# EAGLE board speed (EAGLE 8.2.2)
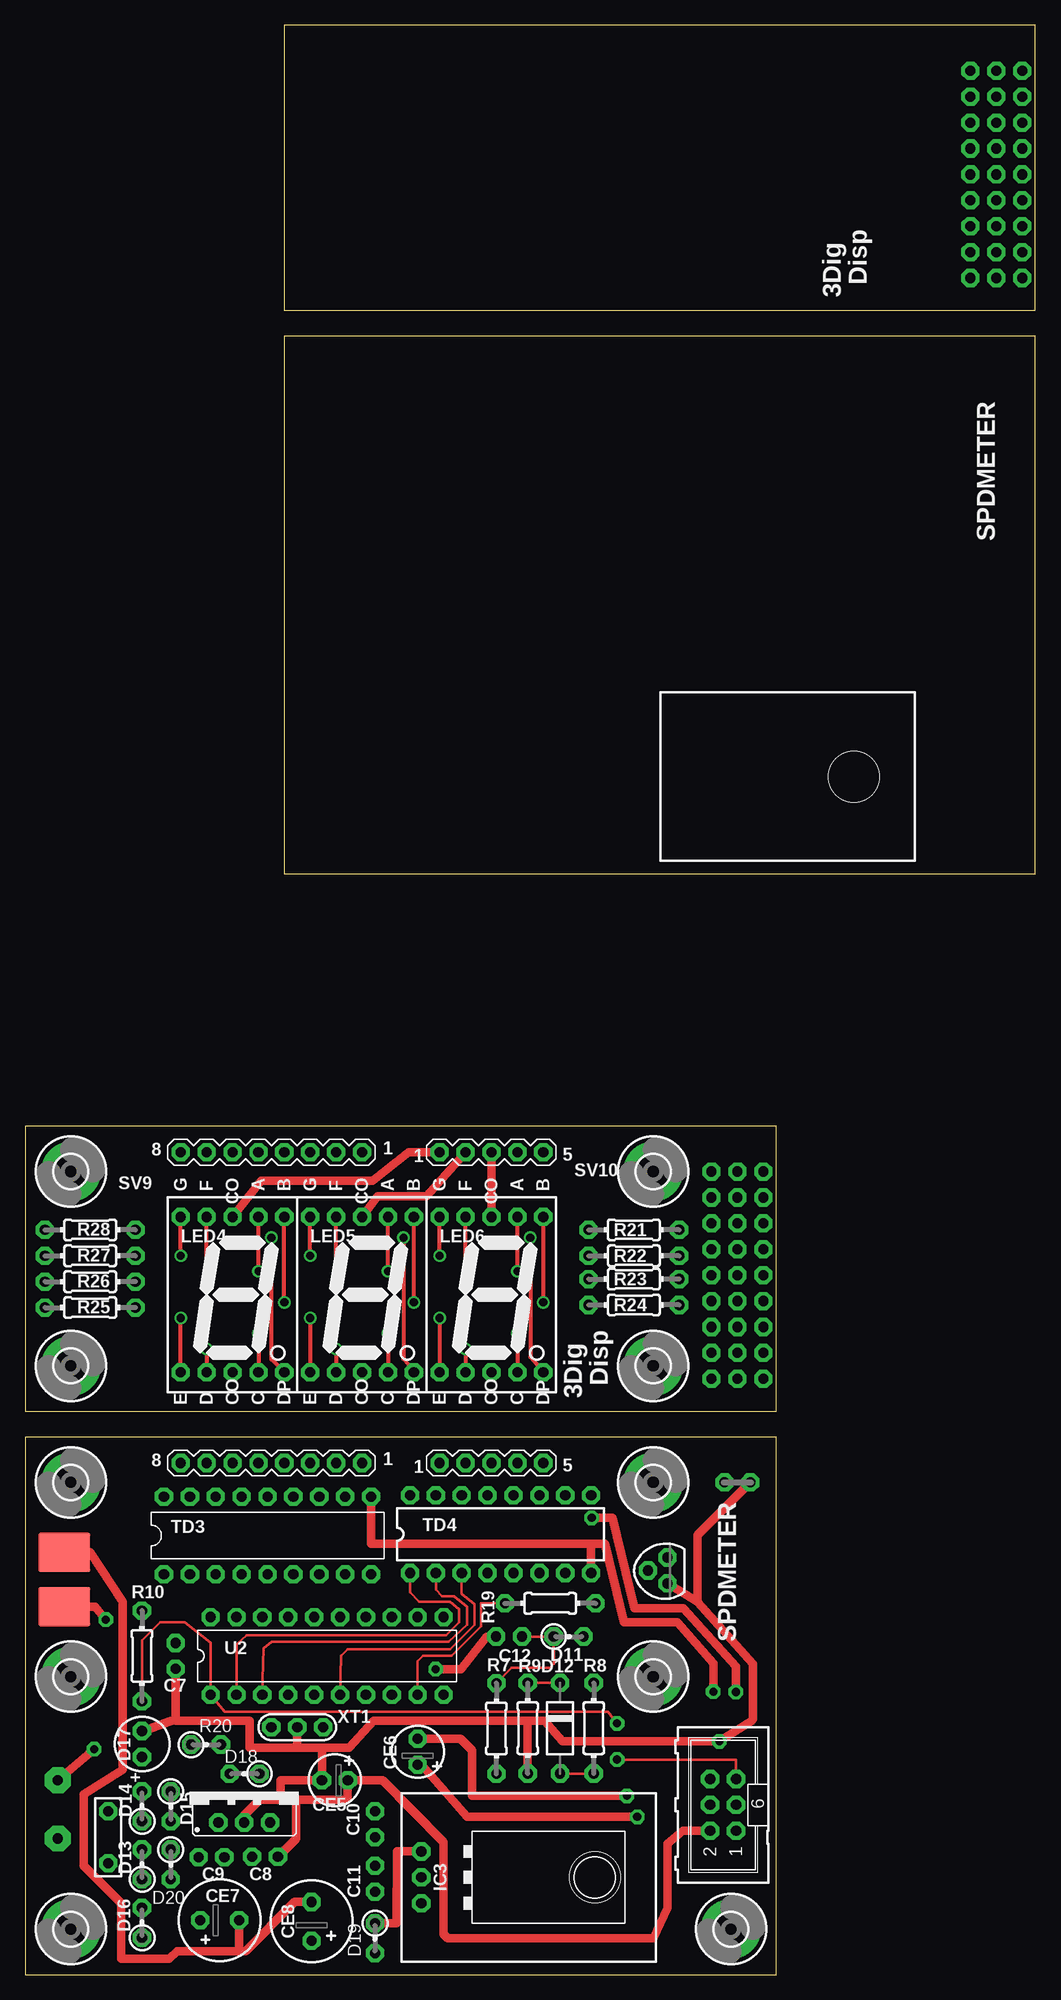
[diagram p0: board, top side]
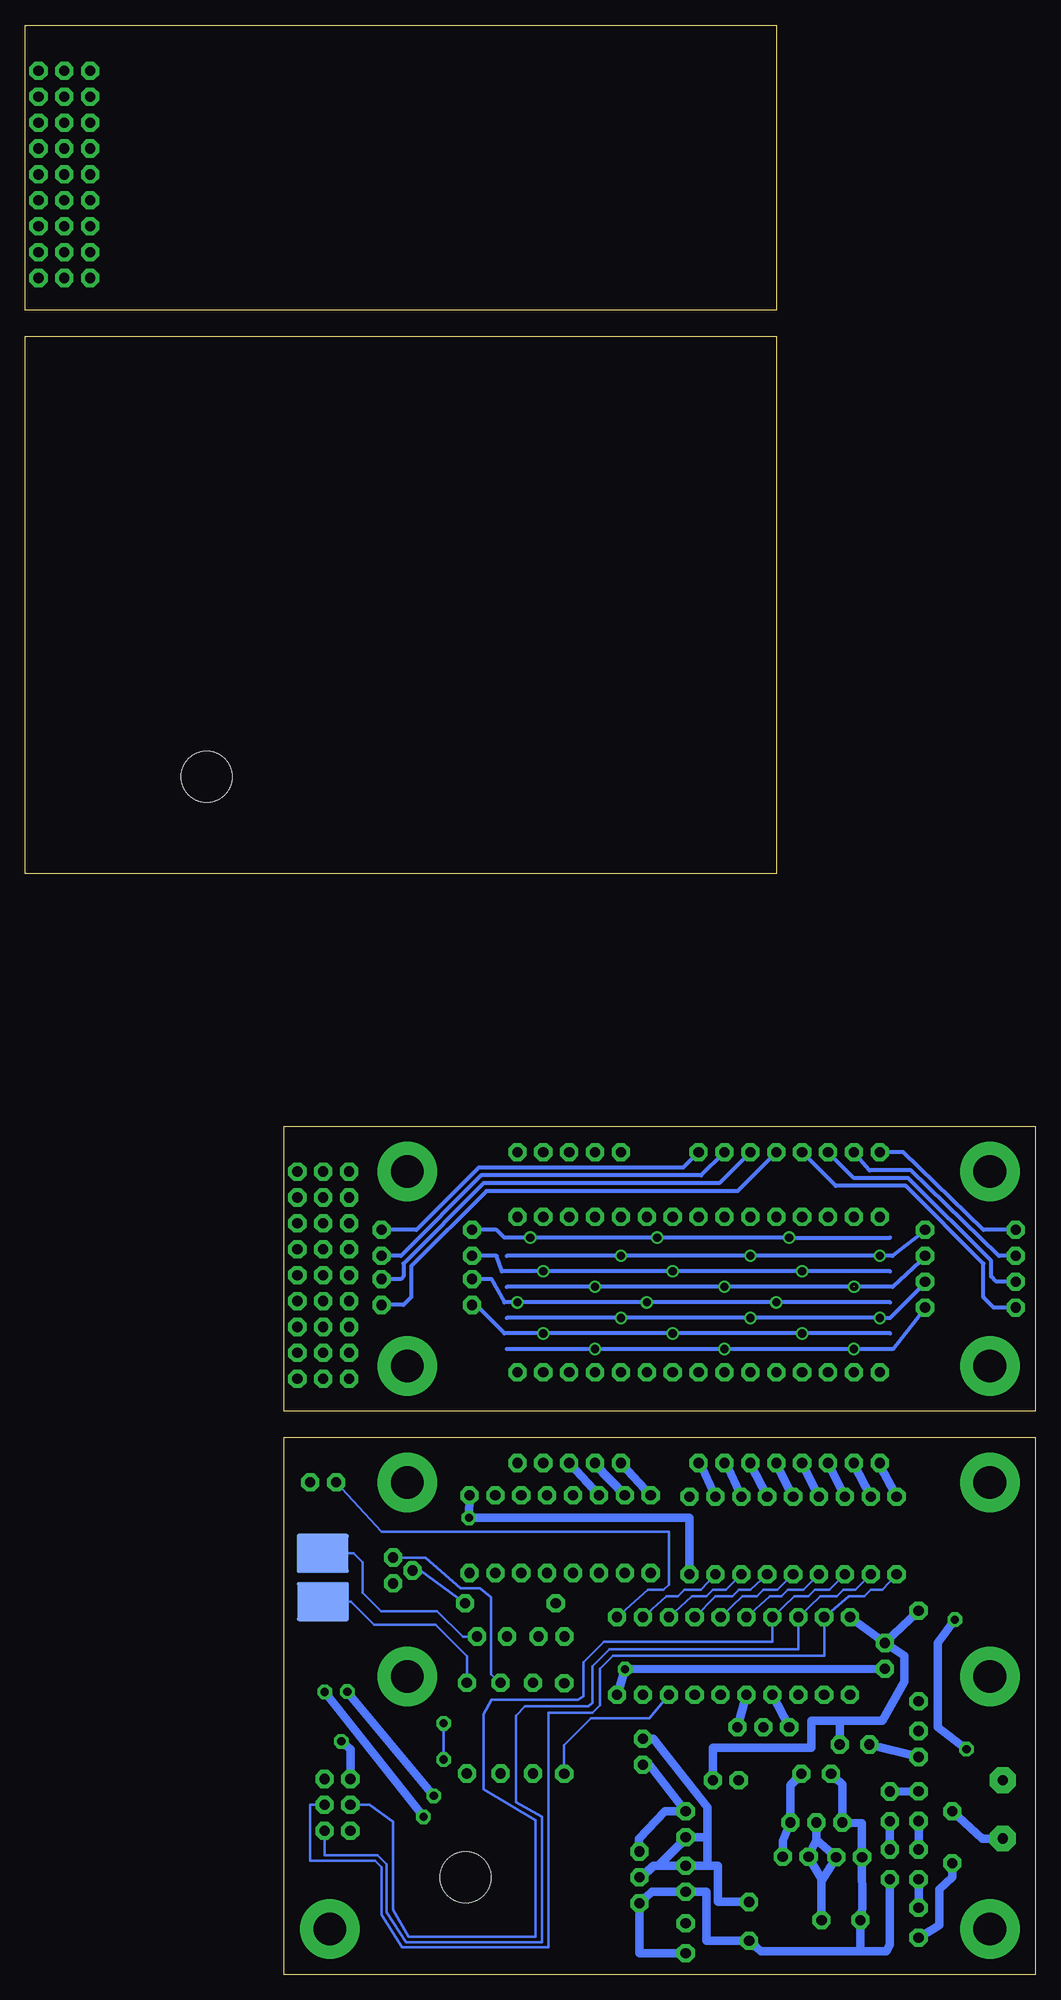
[diagram p1: board, bottom side, seen from below]

Size 99.06 x 191.13 mm. Coordinates in mm from the lower left corner, seen from the top.
Outline: 25.4,107.95 99.06,107.95 99.06,160.66 25.4,160.66 25.4,107.95
Outline: 25.4,163.19 99.06,163.19 99.06,191.13 25.4,191.13 25.4,163.19
Outline: 0,0 73.66,0 73.66,52.71 0,52.71 0,0
Outline: 0,55.25 73.66,55.25 73.66,83.19 0,83.19 0,55.25
Copper layers (1*16): Top 0.0356mm / dielectric 1.5011mm / Bottom 0.0356mm
Design rules "SilverCircuits": minimum track width 10mil, minimum drill 24mil, track to track 8mil, track to pad 8mil, pad to pad 8mil, via to via 8mil, smd to smd 8mil, copper to edge 40mil, drill to drill 8mil, minimum pad ring 10mil, minimum via ring 8mil, stop-mask expansion 4mil, vias tented up to drill 0mil, thermal gap 10mil
Net classes: 0 default: width 0.254 mm; 1 SUPLLY: width 0.813 mm

## Footprints (pad centres in the part's own frame; a part is rotated, then mirrored left to right if it is on the bottom)
C-2,5 = drill 1 pad 1.778 octagon: 1 -1.27,0; 2 1.27,0
ELC-2,5 = drill 1 pad 1.778 octagon: MAINAS 2.54,0; PLUS 0,0
ELC-5 = drill 1 pad 1.778 octagon: MAINAS 3.175,0; PLUS -0.635,0
0204V = drill 1 pad 1.778 octagon: 1 -1.46,0; 2 1.46,0
DIP-2-10 = drill 1 pad 1.778 octagon: A 4.445,0; C -4.445,0
LED5MM = drill 1 pad 1.778 octagon: A -1.27,0; K 1.27,0
3,2-PAD = drill 3.2 pad 5.842: B3,2 0,0
78XXL = drill 1 pad 1.778 octagon: GND 0,-6.3; IN -2.54,-6.3; OUT 2.54,-6.3
78XXS = drill 1 pad 1.778 octagon: GND 0,-3; IN -2.54,-3; OUT 2.54,-3
JUMP2 = drill 1 pad 1.778 octagon: 1 -1.27,0; 2 1.27,0
7SEG-0.56 = drill 1 pad 1.778 octagon: A 2.54,7.62; B 5.08,7.62; C 2.54,-7.62; COM 0,7.62; COM1 0,-7.62; D -2.54,-7.62; DP 5.08,-7.62; E -5.08,-7.62; F -2.54,7.62; G -5.08,7.62
0204/5 = drill 1 pad 1.778 octagon: 1 -2.54,0; 2 2.54,0
CFPAD = smd 5.08 x 3.81: CPAD 0,0
CPPAD = drill 1 pad 2.54 octagon: CPPAD 0,0
0204/7 = drill 1 pad 1.778 octagon: 1 -4.445,0; 2 4.445,0
MA08-1 = drill 1 pad 1.778 octagon: 1 -8.89,0; 2 -6.35,0; 3 -3.81,0; 4 -1.27,0; 5 1.27,0; 6 3.81,0; 7 6.35,0; 8 8.89,0
MA05-1 = drill 1 pad 1.778 octagon: 1 -5.08,0; 2 -2.54,0; 3 0,0; 4 2.54,0; 5 5.08,0
ML6 = drill 1 pad 1.778 octagon: 1 -2.54,-1.27; 2 -2.54,1.27; 3 0,-1.27; 4 0,1.27; 5 2.54,-1.27; 6 2.54,1.27
TO92 = drill 1 pad 1.778 octagon: 1 1.27,0; 2 0,1.905; 3 -1.27,0
DIP-18 = drill 1 pad 1.778 octagon: 1 -10.16,-3.81; 2 -7.62,-3.81; 3 -5.08,-3.81; 4 -2.54,-3.81; 5 0,-3.81; 6 2.54,-3.81; 7 5.08,-3.81; 8 7.62,-3.81; 9 10.16,-3.81; 10 10.16,3.81; 11 7.62,3.81; 12 5.08,3.81; 13 2.54,3.81; 14 0,3.81; 15 -2.54,3.81; 16 -5.08,3.81; 17 -7.62,3.81; 18 -10.16,3.81
DIP-16 = drill 1 pad 1.778 octagon: 1 -8.89,-3.81; 2 -6.35,-3.81; 3 -3.81,-3.81; 4 -1.27,-3.81; 5 1.27,-3.81; 6 3.81,-3.81; 7 6.35,-3.81; 8 8.89,-3.81; 9 8.89,3.81; 10 6.35,3.81; 11 3.81,3.81; 12 1.27,3.81; 13 -1.27,3.81; 14 -3.81,3.81; 15 -6.35,3.81; 16 -8.89,3.81
DIP-20 = drill 1 pad 1.778 octagon: 1 -11.43,-3.81; 2 -8.89,-3.81; 3 -6.35,-3.81; 4 -3.81,-3.81; 5 -1.27,-3.81; 6 1.27,-3.81; 7 3.81,-3.81; 8 6.35,-3.81; 9 8.89,-3.81; 10 11.43,-3.81; 11 11.43,3.81; 12 8.89,3.81; 13 6.35,3.81; 14 3.81,3.81; 15 1.27,3.81; 16 -1.27,3.81; 17 -3.81,3.81; 18 -6.35,3.81; 19 -8.89,3.81; 20 -11.43,3.81
TO-220HEATSINKN = hole 5: 0,0
CELALOCK = drill 1 pad 1.778 octagon: GND 0,0; X1 -2.54,0; X2 2.54,0

## Placement (x,y rotation side)
C7  0.1  [C-2,5]  14.73,31.24 90 top
C8  0.1  [C-2,5]  23.49,11.56 0 top
C9  0.1  [C-2,5]  18.25,11.51 180 top
C10  0.1  [C-2,5]  34.29,14.73 90 top
C11  0.1  [C-2,5]  34.29,9.4 270 top
C12  1000p  [C-2,5]  47.45,33.15 0 top
CE5  100  [ELC-2,5]  31.62,19.05 180 top
CE6  100  [ELC-2,5]  38.48,20.57 90 top
CE7  220  [ELC-5]  17.78,5.33 0 top
CE8  220  [ELC-5]  28.07,3.94 90 top
D11  SHOT  [0204V]  53.29,33.15 0 top
D12  [DIP-2-10]  52.45,24.16 270 top
D13  [0204V]  11.43,10.8 90 top
D14  [0204V]  11.43,16.51 90 top
D15  [0204V]  14.25,16.48 270 top
D16  [0204V]  11.43,5.08 90 top
D17  LED  [LED5MM]  11.43,22.61 90 top
D18  [0204V]  21.48,19.67 180 top
D19  [0204V]  34.29,3.56 270 top
D20  [0204V]  14.25,10.8 270 top
H7  MOUNT-PAD-ROUND3.2  [3,2-PAD]  4.45,4.45 0 top
H8  MOUNT-PAD-ROUND3.2  [3,2-PAD]  69.22,4.45 0 top
H9  MOUNT-PAD-ROUND3.2  [3,2-PAD]  61.59,48.26 0 top
H10  MOUNT-PAD-ROUND3.2  [3,2-PAD]  4.45,48.26 0 top
H15  MOUNT-PAD-ROUND3.2  [3,2-PAD]  4.45,29.21 0 top
H16  MOUNT-PAD-ROUND3.2  [3,2-PAD]  61.59,29.21 0 top
H17  MOUNT-PAD-ROUND3.2  [3,2-PAD]  4.45,78.74 0 top
H18  MOUNT-PAD-ROUND3.2  [3,2-PAD]  4.45,59.69 0 top
H19  MOUNT-PAD-ROUND3.2  [3,2-PAD]  61.59,59.69 0 top
H20  MOUNT-PAD-ROUND3.2  [3,2-PAD]  61.59,78.74 0 top
IC3  8V  [78XXL]  45.14,9.53 270 top
IC4  5V  [78XXS]  21.46,17.91 0 top
J2  HUD  [JUMP2]  69.85,48.26 0 top
LED4  C-551X  [7SEG-0.56]  20.32,66.68 0 top
LED5  C-551X  [7SEG-0.56]  33.02,66.68 0 top
LED6  C-551X  [7SEG-0.56]  45.72,66.68 0 top
P2  PL  [0204/5]  8.13,13.46 270 top
PD3  12V  [CFPAD]  3.81,36.07 0 top
PD4  GND  [CFPAD]  3.81,41.4 0 top
PD9  SPD  [CFPAD]  69.9,41.3 0 bottom
PD10  ILM  [CFPAD]  69.88,36.58 0 bottom
PD11  PSW1  [CPPAD]  3.17,19.05 0 top
PD12  PSW2  [CPPAD]  3.17,13.34 0 top
R7  100  [0204/7]  46.2,24.13 270 top
R8  100k  [0204/7]  55.75,24.16 270 top
R9  100k  [0204/7]  49.28,24.16 90 top
R10  10k  [0204/7]  11.43,31.24 90 top
R19  100  [0204/7]  51.49,36.4 180 top
R20  300  [0204V]  17.71,22.55 0 top
R21  [0204/7]  59.69,73.03 180 top
R22  [0204/7]  59.69,70.48 180 top
R23  [0204/7]  59.69,68.2 180 top
R24  [0204/7]  59.69,65.66 180 top
R25  [0204/7]  6.35,65.41 0 top
R26  [0204/7]  6.35,67.94 0 top
R27  [0204/7]  6.35,70.48 0 top
R28  [0204/7]  6.35,73.03 0 top
SV6  SEG  [MA08-1]  24.13,50.17 180 top
SV7  CONT  [MA05-1]  45.72,50.17 0 top
SV8  ISP  [ML6]  68.45,16.64 90 top
SV9  SEG  [MA08-1]  24.13,80.65 180 top
SV10  CONT  [MA05-1]  45.72,80.65 0 top
T2  2SC1815  [TO92]  62.99,39.62 90 top
TD3  TD62783  [DIP-18]  23.75,43.05 0 top
TD4  TD62003  [DIP-16]  46.61,43.18 0 top
U2  ATTINY2313  [DIP-20]  29.59,31.24 0 top
U$1  [TO-220HEATSINKN]  81.28,117.48 180 top
U$2  [TO-220HEATSINKN]  55.88,9.53 180 top
XT1  10M  [CELALOCK]  26.67,24.26 0 top

## Library data of the parts
C7-C12 CE5-CE8 D11-D20 H7-H10 H15-H20 IC3 IC4 J2 LED4-LED6 P2 PD3 PD4 PD9-PD12 R7-R10 R19-R28 SV6-SV10 T2 TD3 TD4 U2 U$1 U$2 XT1 = myparts01

## Nets
+5V/1 [SUPLLY]: C7.2 C8.2 CE5.PLUS D18.1 IC4.OUT R10.2 R20.2 SV8.2 U2.20
+9V [SUPLLY]: C10.2 CE6.PLUS D19.1 IC3.IN TD3.9 TD4.9
B0: LED4.DP LED5.DP LED6.DP R21.2
B1: LED4.A LED5.A LED6.A R22.2
B2: LED4.B LED5.B LED6.B R23.2
B3: LED4.C LED5.C LED6.C R24.2
B4: LED4.D LED5.D LED6.D R25.2
B5: LED4.E LED5.E LED6.E R26.2
B6: LED4.F LED5.F LED6.F R27.2
B7: LED4.G LED5.G LED6.G R28.2
C0 [SUPLLY]: LED4.COM SV10.1
C1 [SUPLLY]: LED5.COM SV10.2
C2 [SUPLLY]: LED6.COM SV10.3
D0: R21.1 SV9.1
D1: R22.1 SV9.2
D2: R23.1 SV9.3
D3: R24.1 SV9.4
D4: R25.1 SV9.5
D5: R26.1 SV9.6
D6: R27.1 SV9.7
D7: R28.1 SV9.8
N$38: R10.1 SV8.5 U2.1
N$45: SV8.3 TD3.1 U2.19
N$46: SV8.1 TD3.2 U2.18
N$47: SV8.4 TD3.3 U2.17
N$48: TD3.4 U2.16
N$49: TD3.5 U2.15
N$50: TD3.6 U2.14
N$51: TD3.7 U2.13
N$52: R7.2 U2.8
N$80: J2.1 U2.11
N$81: C12.2 D11.1 R7.1
N$82: D11.2 PD9.CPAD
N$83: D12.A R8.2
N$84: PD10.CPAD R8.1
N$85: U2.5 XT1.X2
N$86: U2.4 XT1.X1
N$87: R19.2 U2.9
N$88: TD3.8 U2.12
N$89: TD4.1 U2.2
N$90: TD4.2 U2.3
N$91: TD4.3 U2.6
N$92: SV7.1 TD4.16
N$93: SV7.2 TD4.15
N$94: SV7.3 TD4.14
N$95 [SUPLLY]: C9.2 C11.2 CE7.PLUS CE8.PLUS D18.2 D19.2 D20.2 IC3.OUT IC4.IN
N$96: D12.C R9.2 T2.1
N$97 [SUPLLY]: P2.1 PD12.CPPAD
N$98 [SUPLLY]: PD3.CPAD PD11.CPPAD
N$99: SV6.1 TD3.11
N$100: SV6.2 TD3.12
N$101: SV6.3 TD3.13
N$102: SV6.4 TD3.14
N$103: SV6.5 TD3.15
N$104: SV6.6 TD3.16
N$105: SV6.7 TD3.17
N$106: SV6.8 TD3.18
N$107 [SUPLLY]: D16.1 P2.2
N$108 [SUPLLY]: D13.1 D16.2
N$109 [SUPLLY]: D13.2 D14.1
N$110 [SUPLLY]: D14.2 D15.1
N$111: R19.1 T2.2
N$112: D17.A R20.1
N$113 [SUPLLY]: D15.2 D20.1
PE [SUPLLY]: C7.1 C8.1 C9.1 C10.1 C11.1 C12.1 CE5.MAINAS CE6.MAINAS CE7.MAINAS CE8.MAINAS D17.K IC3.GND IC4.GND J2.2 PD4.CPAD R9.1 SV8.6 T2.3 TD3.10 TD4.8 U2.10 XT1.GND

## Tracks (layer width: path | path; a pad name or v marks a point on that pad's centre or on a via)
+5V/1  (1 unrouted)
  Top 0.813: SV8.2 64.52,14.1 62.99,12.83 62.99,6.5 61.59,3.56 41.4,3.56 41.02,3.94 41.02,12.95 35.05,19.05 CE5.PLUS 31.62,17.14 26.54,17.14 26.54,13.34 C8.2
  Bottom 0.813: C7.2 U2.20 | C7.2 12.83,31.24 12.83,28.7 14.99,24.89 19.18,24.89 | 19.18,24.89 21.97,24.89 21.97,22.23 31.62,22.23 CE5.PLUS | C7.2 R10.2 | C8.2 24.76,13.13 IC4.OUT 24,18.55 D18.1 | 19.18,24.89 R20.2
+9V  (via drill 0.8 pad 1.42)
  Top 0.813: CE6.PLUS 38.86,20.57 43.31,15.47 v60.02,15.47 | v69.7,27.71 69.7,30.23 64.54,35.92 59.77,35.92 57.58,44.78 v55.55,44.78 | D19.1 36.42,5.02 36.45,12.06 IC3.IN
  Bottom 0.813: IC3.IN 38.86,13.34 36.32,16 C10.2 | C10.2 34.04,16 | C10.2 37.85,20.57 CE6.PLUS | v60.02,15.47 v69.7,27.71 | TD3.9 33.91,44.78 v55.55,44.78 TD4.9
B0  (via drill 0.8)
  Top 0.406: LED6.DP 49.53,60.58 v49.53,72.26 | LED5.DP 37.08,60.38 v37.08,72.26 | LED4.DP 24.13,60.33 v24.13,72.26
  Bottom 0.406: R21.2 52.83,73.03 52.07,72.26 v49.53,72.26 v37.08,72.26 v24.13,72.26 14.22,72.26
B1  (via drill 0.8)
  Top 0.406: v22.86,68.96 LED4.A | v35.56,68.96 LED5.A | v48.26,68.96 LED6.A
  Bottom 0.406: R22.2 52.83,70.48 52.32,68.96 v48.26,68.96 v35.56,68.96 v22.86,68.96 14.22,68.96
B2  (via drill 0.8)
  Top 0.406: v25.4,65.91 LED4.B | v38.1,65.91 LED5.B | v50.8,65.91 LED6.B
  Bottom 0.406: R23.2 53.34,68.2 52.07,65.91 v50.8,65.91 v38.1,65.91 v25.4,65.91 14.22,65.91
B3  (via drill 0.8)
  Top 0.406: v35.56,62.87 LED5.C | v22.86,62.87 LED4.C | v48.26,62.87 LED6.C
  Bottom 0.406: R24.2 54.86,65.66 52.07,62.87 v48.26,62.87 v35.56,62.87 v22.86,62.87 14.22,62.87
B4  (via drill 0.8)
  Top 0.406: v43.18,61.34 LED6.D | v17.78,61.34 LED4.D | v30.48,61.34 LED5.D
  Bottom 0.406: R25.2 13.97,61.34 v17.78,61.34 v30.48,61.34 v43.18,61.34 51.82,61.34
B5  (via drill 0.8)
  Top 0.406: v40.64,64.39 LED6.E | LED4.E v15.24,64.39 | v27.94,64.39 LED5.E
  Bottom 0.406: 51.82,64.39 v40.64,64.39 v27.94,64.39 v15.24,64.39 14.22,64.39 10.67,67.94 R26.2
B6  (via drill 0.8)  (1 unrouted)
  Top 0.406: 17.78,67.44 LED4.F | v30.48,67.44 LED5.F | v43.18,67.44 LED6.F
  Bottom 0.406: 51.82,67.44 v43.18,67.44 v30.48,67.44 v17.75,67.44 13.97,67.44 10.67,70.48 R27.2
B7  (via drill 0.8)
  Top 0.406: v15.24,70.48 LED4.G | v40.64,70.48 LED6.G | v27.94,70.48 LED5.G
  Bottom 0.406: 51.82,70.48 v40.64,70.48 v27.94,70.48 v15.24,70.48 13.97,70.48 10.67,73.03 R28.2
C0
  Top 0.813: SV10.1 37.59,80.65 34.04,77.85 23.11,77.85 LED4.COM
C1
  Top 0.813: SV10.2 39.37,76.33 34.54,76.33 LED5.COM
C2
  Top 0.813: LED6.COM SV10.3
D0
  Bottom 0.406: SV9.1 34.54,79.12 54.61,79.12 60.71,73.03 R21.1
D1
  Bottom 0.406: SV9.2 32.77,78.36 54.36,78.36 62.23,70.48 R22.1 64.26,70.48
D2
  Bottom 0.406: SV9.3 30.99,77.6 54.1,77.6 61.98,69.72 61.98,68.45 62.23,68.2 R23.1 64.26,68.2
D3
  Bottom 0.406: SV9.4 29.21,76.84 53.85,76.84 61.21,69.47 61.21,66.42 61.98,65.66 R24.1 64.26,65.66
D4
  Bottom 0.406: SV9.5 19.56,77.34 12.7,77.34 5.08,69.72 5.08,66.42 4.06,65.41 R25.1 1.78,65.41
D5
  Bottom 0.406: SV9.6 17.78,78.11 12.45,78.11 4.32,69.98 4.32,68.45 3.81,67.94 R26.1
D6
  Bottom 0.406: R27.1 3.56,70.48 12.19,78.87 16.26,78.87 SV9.7
D7
  Bottom 0.406: SV9.8 12.95,80.65 5.08,73.03 R28.1
N$38  (via drill 0.8 pad 1.42)
  Top 0.254: R10.1 11.43,32.77 13.21,34.54 15.62,34.54 18.16,32.51 U2.1 19.56,25.78 57.15,25.78 v58.04,24.64 | v58.04,21.08 69.72,21.08 SV8.5
  Bottom 0.254: v58.04,24.64 v58.04,21.08
N$45
  Bottom 0.254: TD3.1 14.99,37.72 16.13,37.72 16.76,37.08 18.29,37.08 U2.19 20.7,31.24 41.4,31.24 42.67,29.97 42.67,26.42 43.43,25.65 47.75,25.65 47.75,2.67 62.1,2.67 64.13,5.84 64.13,10.54 64.77,11.18 71.12,11.18 71.12,16.64 SV8.3
N$46
  Bottom 0.254: TD3.2 17.65,37.72 18.8,37.72 19.43,37.08 21.08,37.08 U2.18 23.24,31.88 41.78,31.88 43.43,30.23 43.43,26.67 43.81,26.29 50.04,26.29 50.93,25.4 50.93,16.89 48.39,15.49 48.39,3.17 61.72,3.17 63.63,6.1 63.63,10.8 64.52,11.68 69.72,11.68 SV8.1
N$47
  Bottom 0.254: 18.54,39.37 TD3.3 20.19,37.72 21.59,37.72 22.22,37.08 23.62,37.08 U2.17 25.78,32.64 42.29,32.64 44.32,30.61 44.32,27.31 44.83,26.92 53.34,26.92 54.1,25.53 54.1,18.16 49.02,15.11 49.02,3.68 61.47,3.68 62.99,6.35 62.99,14.99 65.28,16.64 SV8.4
N$48
  Bottom 0.254: U2.16 26.04,37.08 24.89,37.08 24.26,37.72 22.73,37.72 TD3.4
N$49
  Bottom 0.254: U2.15 30.73,35.18 28.7,37.08 27.3,37.08 26.67,37.72 25.27,37.72 TD3.5
N$50
  Bottom 0.254: U2.14 31.37,37.08 29.72,37.08 29.08,37.72 27.94,37.72 TD3.6
N$51
  Bottom 0.254: U2.13 33.66,37.08 32.26,37.08 31.62,37.72 30.35,37.72 TD3.7
N$52
  Bottom 0.254: R7.2 46.23,22.48 43.56,25.15 37.85,25.15 U2.8
N$53  (via drill 1 pad 1.78)
  other vias: 97.79,186.69
N$54  (via drill 1 pad 1.78)
  other vias: 95.25,186.69
N$55  (via drill 1 pad 1.78)
  other vias: 92.71,186.69
N$56  (via drill 1 pad 1.78)
  other vias: 92.71,184.15
N$57  (via drill 1 pad 1.78)
  other vias: 95.25,184.15
N$58  (via drill 1 pad 1.78)
  other vias: 97.79,184.15
N$59  (via drill 1 pad 1.78)
  other vias: 97.79,181.61
N$60  (via drill 1 pad 1.78)
  other vias: 95.25,181.61
N$61  (via drill 1 pad 1.78)
  other vias: 92.71,181.61
N$62  (via drill 1 pad 1.78)
  other vias: 92.71,179.07
N$63  (via drill 1 pad 1.78)
  other vias: 95.25,179.07
N$64  (via drill 1 pad 1.78)
  other vias: 97.79,179.07
N$65  (via drill 1 pad 1.78)
  other vias: 97.79,176.53
N$66  (via drill 1 pad 1.78)
  other vias: 95.25,176.53
N$67  (via drill 1 pad 1.78)
  other vias: 92.71,176.53
N$68  (via drill 1 pad 1.78)
  other vias: 92.71,173.99
N$69  (via drill 1 pad 1.78)
  other vias: 95.25,173.99
N$70  (via drill 1 pad 1.78)
  other vias: 97.79,173.99
N$71  (via drill 1 pad 1.78)
  other vias: 97.79,171.45
N$72  (via drill 1 pad 1.78)
  other vias: 95.25,171.45
N$73  (via drill 1 pad 1.78)
  other vias: 92.71,171.45
N$74  (via drill 1 pad 1.78)
  other vias: 92.71,168.91
N$75  (via drill 1 pad 1.78)
  other vias: 95.25,168.91
N$76  (via drill 1 pad 1.78)
  other vias: 97.79,168.91
N$77  (via drill 1 pad 1.78)
  other vias: 97.79,166.37
N$78  (via drill 1 pad 1.78)
  other vias: 95.25,166.37
N$79  (via drill 1 pad 1.78)
  other vias: 92.71,166.37
N$80
  Bottom 0.254: U2.11 37.97,37.72 36.45,37.72 35.94,38.23 35.94,43.43 64.13,43.43 J2.1
N$81
  Top 0.254: C12.2 D11.1 51.84,30.45 51.46,30.07 47.7,30.07 R7.1
N$82
  Bottom 0.254: D11.2 56.11,33.15 58.7,35.61 64.19,35.61 65.96,37.41 65.96,40.44 66.85,41.33 70.18,41.33 PD9.CPAD
N$83
  Top 0.254: D12.A R8.2
N$84
  Bottom 0.254: R8.1 55.75,31.22 58.83,34.29 64.85,34.29 67.13,36.58 PD10.CPAD
N$85
  Bottom 0.813: XT1.X2 U2.5
N$86
  Bottom 0.813: XT1.X1 U2.4
N$87
  Top 0.254: R19.2 44.7,36.4 44.7,34.16 41.78,31.24 38.99,31.24 38.48,30.73 U2.9
N$88
  Bottom 0.254: TD3.8 32.77,37.72 34.42,37.72 35.05,37.08 36.2,37.08 U2.12
N$89
  Top 0.254: U2.2 20.7,32.39 21.72,33.27 41.27,33.27 42.55,34.54 42.55,35.81 41.66,36.58 38.61,36.58 37.72,37.47 TD4.1
N$90
  Top 0.254: U2.3 23.37,32 24.13,32.64 41.53,32.64 43.31,34.29 43.31,36.07 42.04,37.08 40.89,37.08 40.26,37.72 TD4.2
N$91
  Top 0.254: U2.6 30.99,31.24 31.62,31.88 41.66,31.88 44.07,34.29 44.07,36.32 42.8,37.34 TD4.3
N$92
  Bottom 0.813: SV7.1 40.51,50.04 TD4.16
N$93
  Bottom 0.813: SV7.2 43.18,50.04 TD4.15
N$94
  Bottom 0.813: SV7.3 45.59,50.04 TD4.14
N$95
  Bottom 0.813: D20.2 14.25,2.91 14.6,2.29 17.14,2.29 | 17.14,2.29 26.92,2.29 CE8.PLUS 32.26,3.3 32.26,8.13 C11.2 37.59,8.13 IC3.OUT 38.84,2.09 D19.2 | 17.14,2.29 CE7.PLUS 16.97,6.49 C9.2 17.02,14.85 18.92,14.86 | 18.92,14.86 IC4.IN | D18.2 18.92,18.64 18.92,14.86
N$96
  Top 0.254: R9.2 D12.C
  Bottom 0.254: D12.C 53.36,29.46 53.36,36.98 54.46,37.9 56.36,37.9 59.82,40.89 T2.1
N$97
  Bottom 0.813: PD12.CPPAD 5.21,13.34 P2.1
N$98  (via drill 0.8 pad 1.42)
  Top 0.813: PD3.CPAD 6.86,36.07 v7.87,34.8 | PD11.CPPAD v6.73,22.1
  Bottom 0.813: v7.87,34.8 9.52,32.51 9.52,24.26 v6.73,22.1
N$99
  Bottom 0.813: SV6.1 32.89,50.17 TD3.11
N$100
  Bottom 0.813: SV6.2 30.35,50.17 TD3.12
N$101
  Bottom 0.813: SV6.3 27.94,50.04 TD3.13
N$102
  Bottom 0.813: SV6.4 25.4,50.04 TD3.14
N$103
  Bottom 0.813: SV6.5 22.86,50.04 TD3.15
N$104
  Bottom 0.813: TD3.16 SV6.6
N$105
  Bottom 0.813: SV6.7 17.78,50.04 TD3.17
N$106
  Bottom 0.813: SV6.8 15.37,50.17 TD3.18
N$107
  Bottom 0.813: P2.2 8.13,9.53 9.4,8.38 9.4,4.83 D16.1
N$108
  Bottom 0.813: D16.2 D13.1
N$109
  Bottom 0.813: D13.2 D14.1
N$110
  Bottom 0.813: D14.2 D15.1
N$111
  Bottom 0.254: R19.1 60.32,39.62 T2.2
N$112  (1 unrouted)
  Bottom 0.813: D17.A R20.1
N$113
  Bottom 0.813: D20.1 D15.2
N$114  (via drill 1 pad 1.78)
  other vias: 72.39,78.74
N$115  (via drill 1 pad 1.78)
  other vias: 69.85,78.74
N$116  (via drill 1 pad 1.78)
  other vias: 67.31,78.74
N$117  (via drill 1 pad 1.78)
  other vias: 67.31,76.2
N$118  (via drill 1 pad 1.78)
  other vias: 69.85,76.2
N$119  (via drill 1 pad 1.78)
  other vias: 72.39,76.2
N$120  (via drill 1 pad 1.78)
  other vias: 72.39,73.66
N$121  (via drill 1 pad 1.78)
  other vias: 69.85,73.66
N$122  (via drill 1 pad 1.78)
  other vias: 67.31,73.66
N$123  (via drill 1 pad 1.78)
  other vias: 67.31,71.12
N$124  (via drill 1 pad 1.78)
  other vias: 69.85,71.12
N$125  (via drill 1 pad 1.78)
  other vias: 72.39,71.12
N$126  (via drill 1 pad 1.78)
  other vias: 72.39,68.58
N$127  (via drill 1 pad 1.78)
  other vias: 69.85,68.58
N$128  (via drill 1 pad 1.78)
  other vias: 67.31,68.58
N$129  (via drill 1 pad 1.78)
  other vias: 67.31,66.04
N$130  (via drill 1 pad 1.78)
  other vias: 69.85,66.04
N$131  (via drill 1 pad 1.78)
  other vias: 72.39,66.04
N$132  (via drill 1 pad 1.78)
  other vias: 72.39,63.5
N$133  (via drill 1 pad 1.78)
  other vias: 69.85,63.5
N$134  (via drill 1 pad 1.78)
  other vias: 67.31,63.5
N$135  (via drill 1 pad 1.78)
  other vias: 67.31,60.96
N$136  (via drill 1 pad 1.78)
  other vias: 69.85,60.96
N$137  (via drill 1 pad 1.78)
  other vias: 72.39,60.96
N$138  (via drill 1 pad 1.78)
  other vias: 72.39,58.42
N$139  (via drill 1 pad 1.78)
  other vias: 69.85,58.42
N$140  (via drill 1 pad 1.78)
  other vias: 67.31,58.42
PE  (via drill 0.8 pad 1.42)
  Top 0.813: 29.08,22.23 CE5.MAINAS 25.02,19.05 25.02,17.14 22.99,17.14 21.46,15.62 IC4.GND | 14.73,25.02 14.73,24.89 21.97,24.89 21.97,22.23 29.08,22.23 | 14.73,25.02 C7.1 | CE6.MAINAS 42.67,23.11 43.81,21.97 43.81,17.53 v59,17.53 | v67.49,27.74 67.49,30.53 63.96,34.54 58.73,34.54 58.7,34.57 56.84,42.27 55.5,42.27 | 55.5,42.27 33.91,42.27 TD3.10 | 55.5,42.27 TD4.8 | 49.28,24.89 R9.1 | 49.28,24.89 34.16,24.89 31.75,22.23 29.08,22.23 | 26.67,22.23 25.78,22.23 | 29.08,22.23 26.67,22.23 | 65.91,36.58 71.37,30.48 71.37,25.15 | 65.91,36.58 T2.3 | 71.37,25.15 71.37,25.02 | 49.28,24.89 50.93,24.89 52.7,22.86 v68.07,22.86 71.25,24.89 71.37,25.15 | J2.2 65.91,43.05 65.91,36.58 | 26.67,22.23 XT1.GND | D17.K 11.51,23.83 14.73,25.02 | PD4.CPAD 6.35,41.4 9.52,36.58 9.52,20.07 5.71,17.65 5.71,10.67 9.4,6.98 9.4,1.52 14.1,1.52 14.86,2.29 20.95,2.29 | 20.95,2.29 21.59,2.29 26.42,7.11 CE8.MAINAS | 20.95,2.29 CE7.MAINAS | C12.1 45.24,33.15 42.75,29.95 v40.23,29.95
  Bottom 0.813: 37.46,10.67 IC3.GND | 36.96,10.67 C11.1 32.13,10.67 | C7.1 v40.23,29.95 41,27.46 U2.10 | v59,17.53 v67.49,27.74 | v68.07,22.86 67.18,22.1 SV8.6 | CE8.MAINAS 31.11,7.11 31.11,10.67 32.13,10.67 | C9.1 21.46,13.2 21.46,13.21 | 21.46,13.21 IC4.GND | 21.51,14.99 21.46,14.73 21.46,13.21 | 21.46,13.21 C8.1 20.95,9.4 20.95,9.14 | 20.95,9.14 19.43,11.56 | CE7.MAINAS 20.95,9.14 | 32.13,10.67 32.13,13.46 | 32.13,13.46 32.13,16.38 37.46,23.11 CE6.MAINAS | 36.96,10.67 34.29,13.34 C10.1 32.13,13.46 | 36.96,10.67 37.46,10.67 | 37.46,10.67 38.61,9.53 38.86,9.53

## Text on the board
tPlace: Disp | 3Dig | Disp | 3Dig
tNames: SPDMETER | SPDMETER